# Altium PCB PCB.PcbDoc (part 2 of 2)
Units mm, origin at the board's own origin, x right, y up, seen from the top; angles counter-clockwise.
Board outline 59.94 x 52.58 mm, 2 copper layers (Top Layer, Bottom Layer); 90 components, 60 nets, 298 pads, 151 vias.
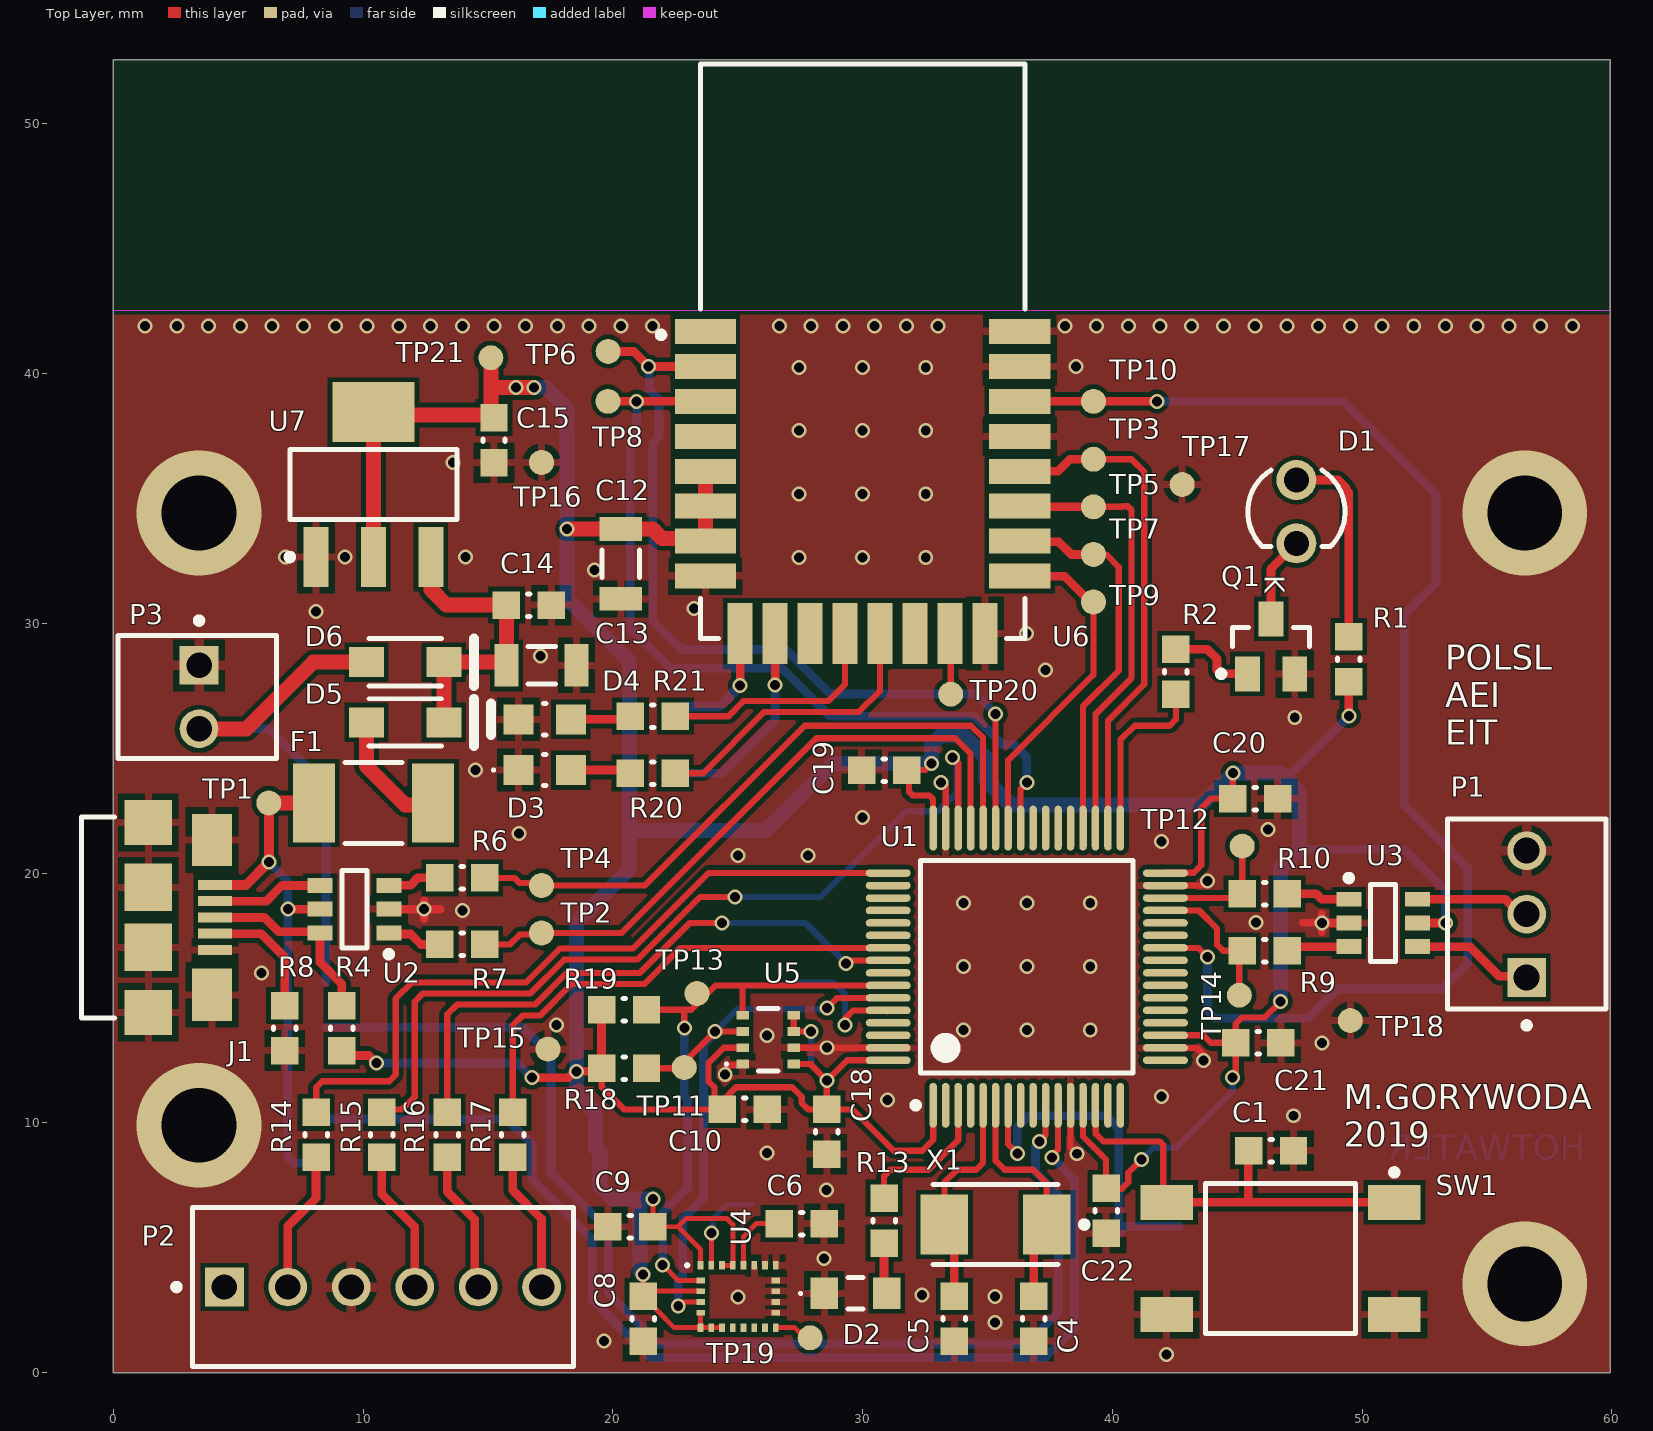
[diagram p0: Top Layer view]

## Via types
v1: diameter 0.6, hole 0.4, Top Layer to Bottom Layer, tented both sides, 147 vias
v2: diameter 5, hole 3, Top Layer to Bottom Layer, 4 vias

## Nets (pads, with @x,y where several pads share a name; then routed paths per layer and width w, separated by ;. In a path a pad name is that pad's centre, name@x,y a point inside that pad or via, vN(x,y) a via of type N, cw(c..) or ccw(c..) an arc to the next point about the centre after c; other vN are vias at no path point) (continued)
SCL: (continued)
  Bottom Layer w0.35: v1(21.993,4.318) 21.993,6.411 22.987,7.405 22.987,10.922 22.86,11.049 v1(22.86,13.798)
SDA: R18.1 TP11.1 U1.59 U4.4 U5.3 | length 24.7
  Top Layer w0.2: v1(22.618,2.667) 22.784,2.833 U4.4
  Top Layer w0.25: R18.1 22.625,12.192 v1(24.093,13.66) U5.3 ; TP11.1 TP11.1@22.86,12.421 ; v1(28.575,14.598) 28.983,15.006 U1.59
  Bottom Layer w0.25: v1(24.093,13.66) 24.989,14.556 28.533,14.556 v1(28.575,14.598)
  Bottom Layer w0.35: v1(22.618,2.667) 22.618,3.695 22.801,3.878 22.801,6.164 23.626,6.989 23.626,13.125 24.093,13.592 v1(24.093,13.66)
SS: TP9.1 U1.42 U6.17 | length 13.8
  Top Layer w0.25: U1.42 35.826,24.269 35.826,24.523 39.243,27.94 TP9.1 TP9.1@39.116,30.861
  Top Layer w0.35: U6.17 38.083,31.894 TP9.1@39.116,30.861
STATUS: R13.2 U1.3 | length 5.8
  Top Layer w0.25: R13.2 30.861,7.874 31.115,8.128 32.639,8.128 33.826,9.315 U1.3
TCK: R14.1 U1.49 | length 29.3
  Top Layer w0.25: R14.1 8.118,11.42 8.366,11.668 11.044,11.668 11.303,11.927 11.303,14.986 11.938,15.621 16.51,15.621 17.87,16.981 20.802,16.981 23.827,20.006 U1.49
TDI: U1.50
TDO: R17.1 U1.55 | length 19.8
  Top Layer w0.25: R17.1 15.992,13.91 16.383,14.301 17.095,14.301 18.36,15.566 21.268,15.566 22.708,17.006 U1.55
TMS: R15.1 U1.46 | length 35
  Top Layer w0.25: R15.1 10.859,10.541 11.557,10.541 12.065,11.049 12.065,14.859 12.387,15.181 16.692,15.181 18.052,16.541 20.984,16.541 23.493,19.05 v1(24.892,19.05) ; v1(33.597,24.638) 33.826,24.409 U1.46
  Bottom Layer w0.25: v1(24.892,19.05) 28.321,19.05 31.75,22.479 33.02,22.479 33.762,23.221 33.762,24.378 33.597,24.543 v1(33.597,24.638)
TRST: R16.1 U1.56 | length 23.8
  Top Layer w0.25: R16.1 13.368,14.346 13.762,14.741 16.896,14.741 18.161,16.006 21.086,16.006 23.086,18.006 v1(24.373,18.006) ; v1(29.337,16.383) 29.46,16.506 U1.56
  Bottom Layer w0.25: v1(24.373,18.006) 27.714,18.006 v1(29.337,16.383)
TX: R9.1 TP14.1 U1.29 | length 6.1
  Top Layer w0.25: U1.29 43.47,18.506 44.196,17.78 44.196,17.131 44.436,16.891 45.085,16.891 R9.1 45.085,16.775 TP14.1@45.085,15.006
VBAT: D6.1 P3.2 R24.2 | length 21.7
  Top Layer w0.6: P3.2 5.334,25.781 8.001,28.448 D6.1
  Bottom Layer w0.35: P3.2 6.223,25.781 8.509,23.495 R24.2
WKUP: TP6.1 U1.43 U6.2 | length 34.4
  Top Layer w0.25: U1.43 v1(35.326,26.372)
  Top Layer w0.35: TP6.1 20.828,40.894 v1(21.428,40.294) U6.2
  Bottom Layer w0.35: v1(21.428,40.294) 21.457,40.265 21.457,39.757 21.463,39.751 21.463,39.37 21.844,38.989 21.844,37.465 21.601,37.222 21.601,30.096 22.741,28.956 26.924,28.956 28.702,27.178 34.52,27.178 v1(35.326,26.372)
pads on no net: P2.1 U1.2 U1.4 U1.8 U1.9 U1.15 U1.16 U1.17 U1.20 U1.21 U1.22 U1.23 U1.24 U1.25 U1.27 U1.28 U1.37 U1.38 U1.39 U1.40 U1.51 U1.52 U1.53 U1.54 U1.57 U1.61 U1.62 U4.9 U4.10 U4.11 U4.12 U6.1 U6.4 U6.11 U6.14

## Polygon pours and split planes (outlines as drawn)
GND on Top Layer "TOP_GND" (solid, remove dead copper, pour order 0): 0,42.545 59.944,42.545 59.944,0 0,0
GND on Bottom Layer "BOT_GND" (solid, remove dead copper, pour order 2): 0,42.545 59.944,42.545 59.944,0 0,0

## Keep-outs
Keep-Out Layer:
  rectangle: 0,42.545 59.944,52.578

## Other copper
Top Layer:
  region: 42.799,50.419
  region: 59.817,52.578
Bottom Layer:
  text "HOTWATER" at 58.928,8.529 h1

## Silkscreen, mask and mechanical layers (free items; w line width, h text height)
Top Overlay:
  text "POLSL  / AEI / EIT" at 53.34,25.146 h1
  text "M.GORYWODA / 2019" at 49.276,9.042 h1
Bottom Overlay:
  text "PHA" at 19.651,25.654 h1
  text "POL" at 19.651,23.241 h1
  text "BOOT0" at 24.257,19.812 h1 r90
  text "RESET" at 38.735,7.62 h1 r90
Mechanical 1:
  the board outline again, w0.254

## Text inside footprints (layer, text, board x,y; h text height)
D1: Top Overlay "K" at 46.101,31.935 h0.8 r270; Mechanical 15 "K" at 46.101,31.935 h0.8 r270